# Altium PCB S7CAS-PLEIADES-CARTE-MERE_P01.PcbDoc (part 4 of 9)
Units mil, origin at the board's own origin, x right, y up, seen from the top; angles counter-clockwise.
Board outline 6153 x 3696 mil, 16 copper layers (Top, Ground Plane 1, Signal Layer 1, Ground Plane 2, Signal Layer 2, Ground Plane 3, Power Plane, Ground Plane 4, Ground Plane 5, Power Plane 2, Ground Plane 6, Signal Layer 3, Ground Plane 7, Signal Layer 4, Ground Plane 8, Bottom), stack 75.282 mil thick; 430 components, 328 nets, 2174 pads, 2158 vias.
Unrouted connection lines stored in the file: 202.
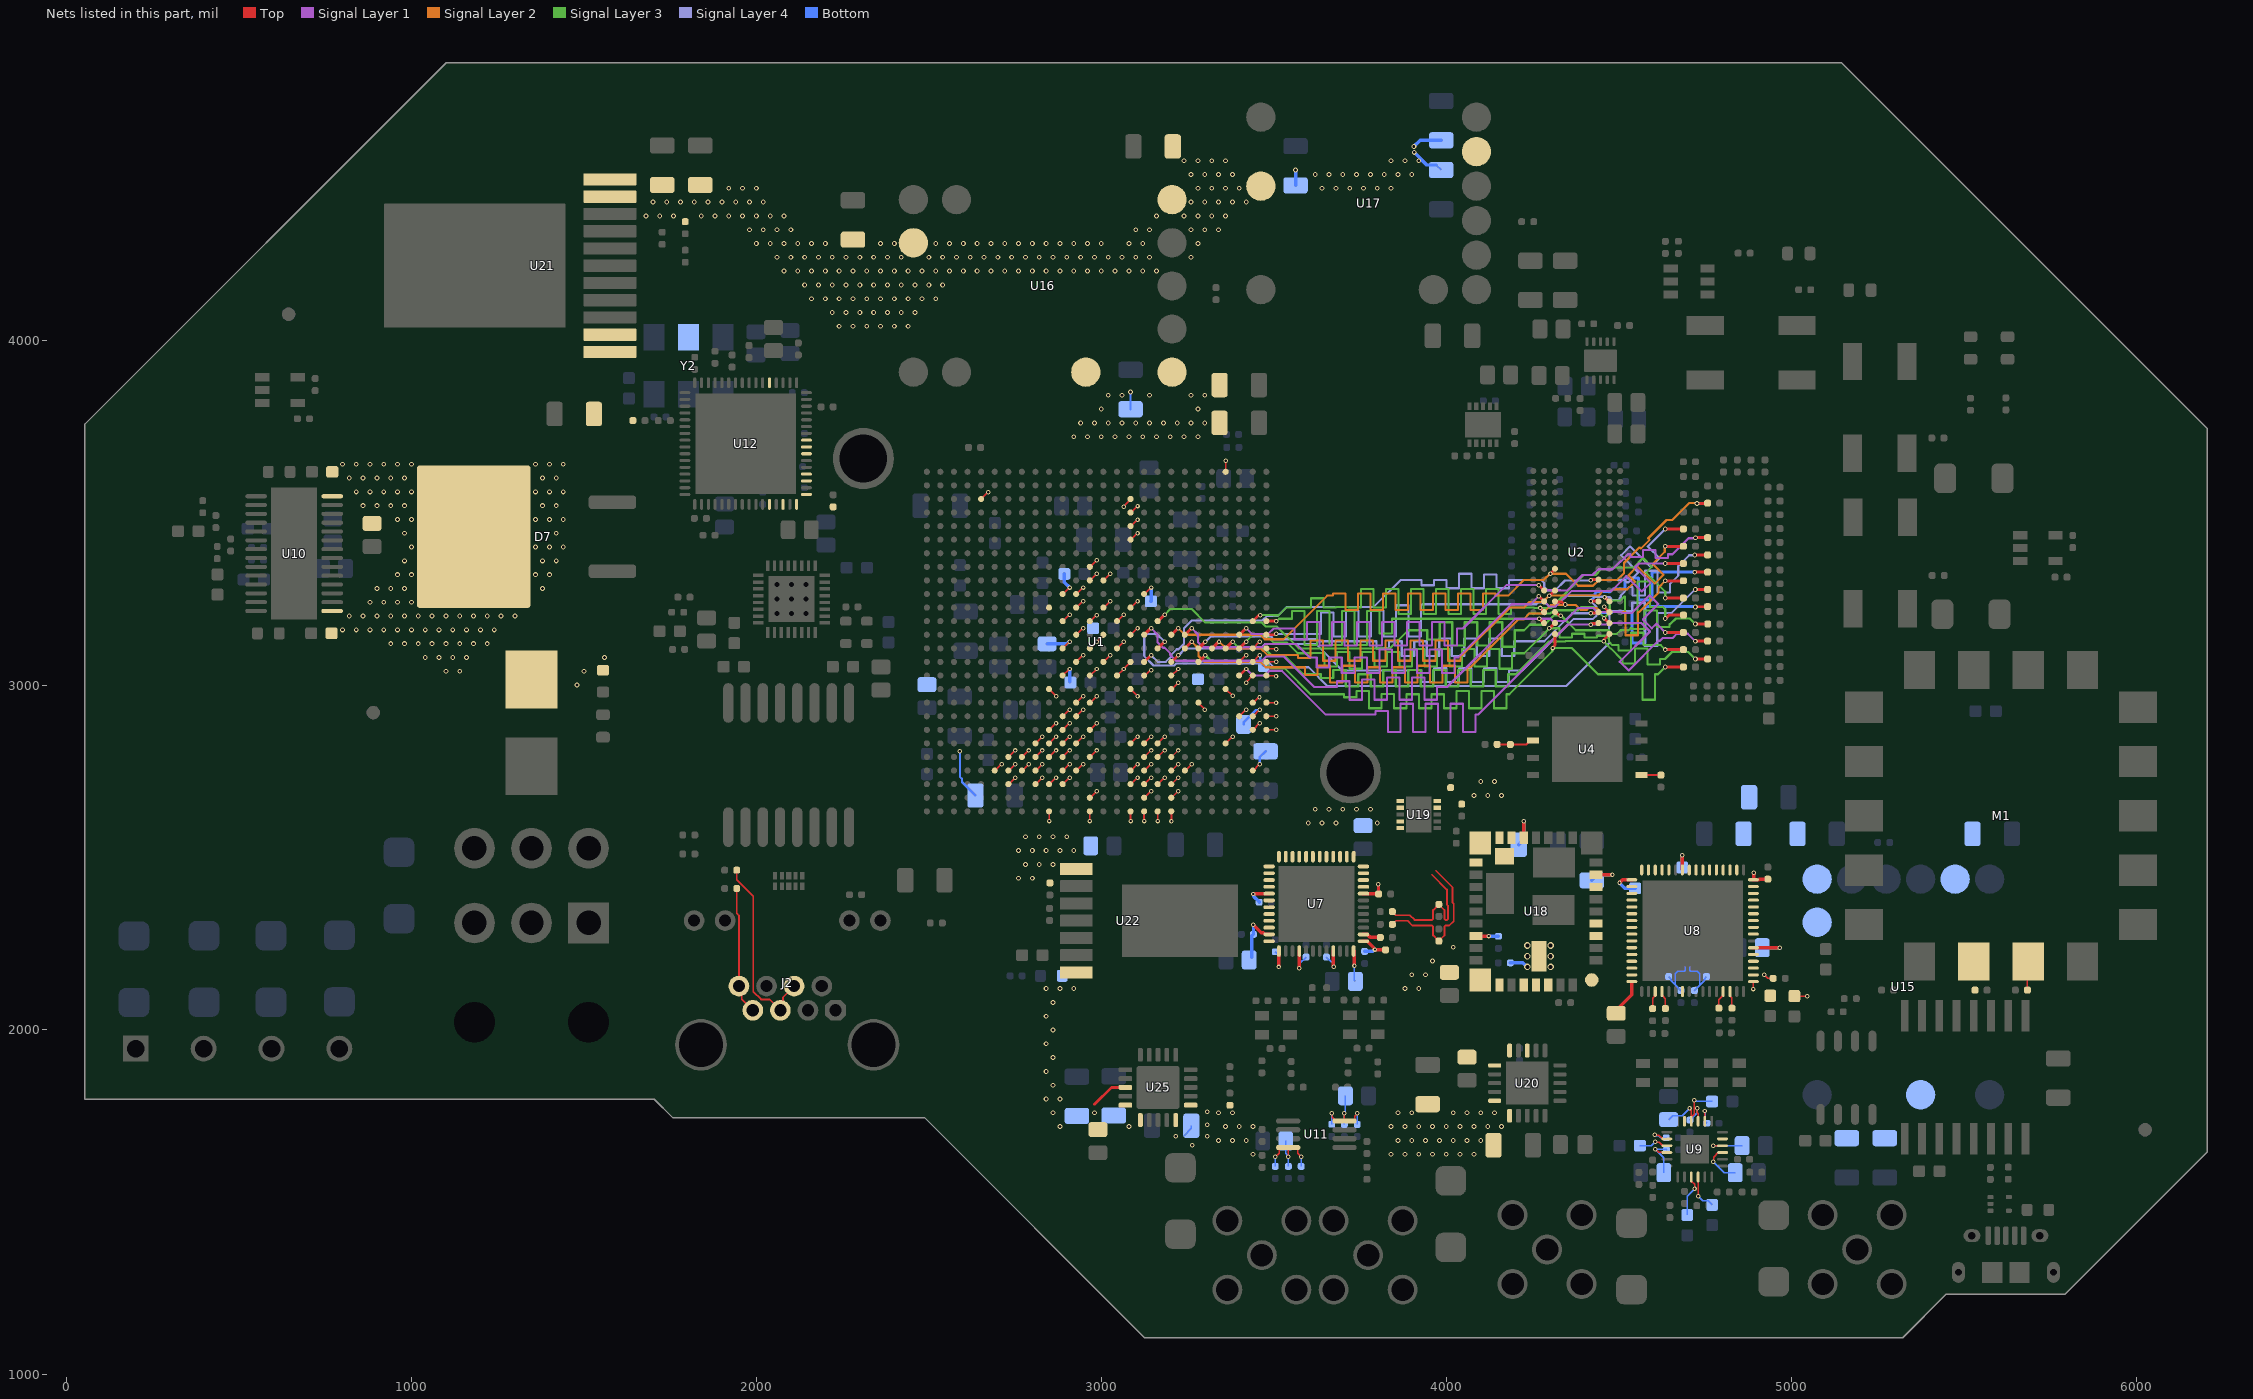
[diagram p17: the nets of this part, all layers, seen from the top]

## Part data (continued)
U23 U24: library part SENS_TEMP_TC74A0-3.3VCTTR, "SENS - TEMPERATURE SENSOR I2C/SMBUS - SOT23-5", Package=SOT23-5, Supplier Part Number 1=TC74A0-3.3VCTDKR-ND, Temperature="-40°C ~ 125°C", Voltage="2.7 V ~ 5.5 V", CreatedBy="Jonathan Bouchard", HelpURL=http://ww1.microchip.com/downloads/en/DeviceDoc/21462D.pdf, Mfg=Microchip, Mfg Part Number=TC74A0-3.3VCTTR, Precision="±2°C (±3°C)", Supplier 1=Digikey
U25: library part REG_LDO_TPS7A4701RGWR, "REG - LINEAR POS ADJ 1A - 20VQFN", Current Rating=1A, Manufacturer #1="Texas Instruments", Manufacturer #2=TBD, Package="20-VQFN Exposed Pad", Supplier Part Number 1=296-37224-1-ND, Temperature="-40°C ~ 125°C", Tolerance=-, Voltage Rating="35V max", Assembly Type=SMD, CreatedBy/Date="L-P Gauthier / 2018-05-29", Cryo=UNKNOWN, GRAMS Lib Spec=2.8, HelpURL=http://www.ti.com/lit/ds/symlink/tps7a47.pdf, Magnetic Material=Unknown, Part Number #1=TPS7A4701RGWR, Part Number #2=TBD, Polarized=Yes, Supplier 1=Digi-Key, VerifiedBy="Caroline Paulin - 28 sept 2018"
U26: "XXX - Description - Package", GRAMS Lib Spec=2.7
Y1: library part OSC_ASDMB-25.000MHZ-LC-T, "OSC - 25MHz XO (Standard) LVCMOS - 4-SMD, No Lead", Manufacturer #1="Abracon LLC", Package="4-SMD, No Lead", Supplier Part Number 1=535-11730-1-ND, Temperature="-40°C ~ +85°C", Tolerance=±50ppm, Voltage Rating="1.8V ~ 3.3V", CreatedBy/Date="Joël Lemay 2019-03-29", Cryo=UNKNOWN, GRAMS Lib Spec=2.8, HelpURL=https://abracon.com/Oscillators/ASDMB.pdf, Magnetic Material=Unknown, Mfg Part Number=ASDMB-25.000MHZ-LC-T, Part Number #1=ASDMB-25.000MHZ-LC-T, Polarized=Yes, Supplier 1=Digi-Key, VerifiedBy="C. Paulin - 29 mai 2019"
Y2: library part OSC_590BD-BDG, "TIM - OSC PROG 125MHz ~ 214.999MHz LVDS 3.3V 7PPM EN/DS - 6-SMD", Current Rating="100 mA (supply)", Manufacturer #1="Silicon Labs", Package=6-SMD, Supplier Part Number 1=590BD-BDG-ND, Temperature="-40°C ~ 85°C", Voltage Rating="3.3V (supply)", CreatedBy/Date="from 590BD-CDG", Cryo=UNKNOWN, GRAMS Lib Spec=2.8, HelpURL=https://www.silabs.com/documents/public/data-sheets/Si590-591.pdf, Magnetic Material=UNKNOWN, Mfg Part Number=590BD-BDG, Part Number #1=590BD-BDG, Polarized=Yes, Supplier 1=Digi-Key, VerifiedBy="Caroline Paulin / 3/10/2019"

## Via types
v1: diameter 14, hole 8, Top to Bottom, 1322 vias
v2: diameter 13, hole 7, Top to Bottom, 662 vias
v3: diameter 19.68, hole 7.87, Top to Bottom, 137 vias
v4: diameter 19.68, hole 11.81, Top to Bottom, 15 vias
v5: diameter 15.75, hole 7.87, Top to Bottom, 12 vias
v6: diameter 22, hole 12, Top to Bottom, 9 vias
v7: diameter 20, hole 12, Top to Bottom, 1 vias

## Nets (pads, with @x,y where several pads share a name; then routed paths per layer and width w, separated by ;. In a path a pad name is that pad's centre, name@x,y a point inside that pad or via, vN(x,y) a via of type N, cw(c..) or ccw(c..) an arc to the next point about the centre after c; other vN are vias at no path point)
1V2: C14.2 C38.2 C40.2 C134.2 C135.2 C136.2 C137.2 C138.2 C139.2 C140.2 U1.K11 U1.K17 U1.L10 U1.L12 U1.L14 U1.L16 U1.M11 U1.M13 U1.M15 U1.N12 U1.N14 U1.N16 U1.P11 U1.P13 U1.P15 U1.R12 U1.R14 U1.R16 U1.T11 U1.T13 U1.T15 U1.T17 U1.U10 U1.U16 U16.5 U16.6 | length 1009.8
  Top w4: U1.K17@2849.15,2988.3 2849.15,2987.84 2869.25,2967.75 v2(2869.52,2967.75) ; U1.L16@2888.52,3027.67 v2@2907.34,3046.49 ; U1.N16@2888.52,3106.41 v2@2907.34,3125.23 ; U1.R16@2888.52,3185.15 v2@2907.34,3203.97 ; U1.U16@2888.52,3263.89 v2@2907.34,3282.71 ; U1.M15@2927.89,3067.04 v2@2946.71,3085.86 ; U1.P15@2927.89,3145.78 v2@2946.71,3164.6 ; U1.T15@2927.89,3224.52 v2@2946.71,3243.34 ; U1.R14@2966.88,3183.55 v2@2985.69,3202.37 ; U1.L14@2967.26,3027.67 v2@2986.08,3046.49 ; U1.N14@2967.26,3106.41 v2@2986.08,3125.23 ; v2(2986.81,3125.23) 2986.81,3125.96 3005.91,3145.05 U1.P13@3005.91,3145.78 ; U1.M13@3006.63,3067.04 v2@3025.45,3085.86 ; U1.T13@3006.63,3224.52 v2@3025.45,3243.34 ; U1.L12@3046,3027.67 v2@3064.82,3046.49 ; U1.N12@3046,3106.41 v2@3064.82,3125.23 ; U1.R12@3046,3185.15 v2@3064.82,3203.97 ; v2@3065.19,3046.85 U1.M11@3085.37,3067.04 ; U1.K11@3085.37,2988.3 3085.37,2987.43 3104.92,2967.89 v2(3104.92,2967.75) ; U1.P11@3085.37,3145.78 v2@3104.19,3164.6 ; U1.T11@3085.37,3224.52 v2@3104.19,3243.34 ; U1.L10@3124.74,3027.67 3127.24,3027.67 3141.86,3042.28 v2(3144.29,3042.28) ; U1.U10@3124.74,3263.89 v2@3143.56,3282.71
  Bottom w4: C139.2@2908.07,3009.06 C139.2@2910.02,3007.12
  Bottom w6: v2(2590.13,2807.78) 2590.13,2734.32 2596.13,2728.32 2596.13,2718.78 C134.2@2635.13,2679.78
  Bottom w7: C40.2@3084.65,3799.72 v1(3084.65,3849.22)
  Bottom w10: C136.2@2842.68,3119.36 2899.77,3119.36 2905.64,3125.23 v2(2908.07,3125.23) ; C138.2@2892.63,3322.08 2892.63,3298.15 v2(2908.07,3282.71) ; C139.2@2908.07,3009.06 v2(2908.07,3046.49) ; C137.2@3143.63,3242.54 3144.29,3243.21 v2(3144.29,3282.71)
  other v1: 2920,3720 2960,3720 3000,3720 3040,3720 3080,3720 3120,3720 3160,3720 3200,3720 3240,3720 3280,3720 2940,3760 2980,3760 3020,3760 3060,3760 3100,3760 3140,3760 3180,3760 3220,3760 3260,3760 3300,3760 3000,3800 3280,3800 3020,3840 3060,3840 3140,3840 3260,3840 3300,3840
  other v2: 2986.81,3046.49 3065.55,3046.49 2947.44,3085.86 3026.18,3085.86 3065.55,3125.23 2947.44,3164.6 3104.92,3164.6 2986.42,3202.37 2908.07,3203.97 3065.55,3203.97 2947.44,3243.34 3026.18,3243.34 3104.92,3243.34
5V: C41.2 C87.2 C88.2 C90.2 C91.2 C92.2 C96.2 C97.2 C98.2 C109.2 C110.2 R124.2 U15.2 U15.9 U16.2 U16.10 U17.2 U17.9 U19.1 U19.2 U19.4 U19.5 U21.10 U21.11 | length 231
  Bottom w4: C96.2@3970.92,4507.5 C96.2@3985.2,4493.22
  Bottom w10: C98.2@3562.98,4448.22 v1(3562.98,4493.22) ; v1(3905.98,4561.22) 3923.98,4579.22 C97.2@3985.2,4579.22 ; v1(3906.98,4544.22) 3943.7,4507.5 C96.2@3970.92,4507.5
  other v1: 3600,2600 3640,2600 3680,2600 3800,2600 3620,2640 3660,2640 3700,2640 3740,2640 3780,2640 2240,4040 2280,4040 2320,4040 2360,4040 2400,4040 2440,4040 2220,4080 2260,4080 2300,4080 2340,4080 2380,4080 2420,4080 2460,4080 2160,4120 2200,4120 2240,4120 2280,4120 2320,4120 2360,4120 2400,4120 2440,4120 2480,4120 2520,4120 2140,4160 2180,4160 2220,4160 2260,4160 2300,4160 2340,4160 2380,4160 2420,4160 2460,4160 2500,4160 2540,4160 2080,4200 2120,4200 2160,4200 2200,4200 2240,4200 2280,4200 2320,4200 2360,4200 2400,4200 2440,4200 2480,4200 2520,4200 2560,4200 2600,4200 2640,4200 2680,4200 2720,4200 2760,4200 2800,4200 2840,4200 2880,4200 2920,4200 2960,4200 3000,4200 3040,4200 3080,4200 3120,4200 3160,4200 2060,4240 2100,4240 2140,4240 2180,4240 2220,4240 2260,4240 2300,4240 2340,4240 2380,4240 2420,4240 2500,4240 2540,4240 2580,4240 2620,4240 2660,4240 2700,4240 2740,4240 2780,4240 2820,4240 2860,4240 2900,4240 2940,4240 2980,4240 3020,4240 3060,4240 3100,4240 3140,4240 3260,4240 2000,4280 2040,4280 2080,4280 2120,4280 2160,4280 2200,4280 2360,4280 2400,4280 2520,4280 2560,4280 2600,4280 2640,4280 2680,4280 2720,4280 2760,4280 2800,4280 2840,4280 2880,4280 2920,4280 2960,4280 3000,4280 3080,4280 3120,4280 3280,4280 1980,4320 2020,4320 2060,4320 2100,4320 3100,4320 3140,4320 3260,4320 3300,4320 3340,4320 1680,4360 1720,4360 1760,4360 1840,4360 1880,4360 1920,4360 1960,4360 2000,4360 2040,4360 2080,4360 3160,4360 3240,4360 3280,4360 3320,4360 3360,4360 1700,4400 1740,4400 1780,4400 1820,4400 1860,4400 1900,4400 1940,4400 1980,4400 2020,4400 3260,4400 3300,4400 3340,4400 3380,4400 3420,4400 1920,4440 1960,4440 2000,4440 3280,4440 3320,4440 3360,4440 3400,4440 3640,4440 3680,4440 3720,4440 3760,4440 3800,4440 3840,4440 3260,4480 3300,4480 3340,4480 3380,4480 3620,4480 3660,4480 3700,4480 3740,4480 3780,4480 3820,4480 3860,4480 3900,4480 3240,4520 3280,4520 3320,4520 3360,4520 3840,4520 3880,4520 3920,4520
5V_AMP: C68.2 C188.2 C189.2 C190.2 C191.2 C213.2 C214.2 C215.2 C216.2 C217.2 C218.2 R133.2 U9.3 U9.4 U9.9 U9.10 U9.14 U9.20 U11.8 U25.1 U25.20 | length 916.3
  Top w4: v2(3504.31,1632.25) 3515.12,1643.06 3515.12,1653.94 3520.55,1659.37 U11.8@3541.59,1659.37 ; v2(3542.31,1632.25) 3542.31,1658.64 U11.8@3541.59,1659.37 ; v2(3579.82,1632.25) 3569.01,1643.06 3569.01,1653.94 3563.59,1659.37 U11.8@3541.59,1659.37 ; v2(4604.13,1695.78) 4604.62,1695.29 4616.63,1695.29 4627.61,1684.31 U9.20@4639.42,1684.31 ; U9.3@4710.28,1574.07 4710.28,1562.26 4719.63,1552.92 v2(4719.63,1539.78) ; v2(4729.97,1518.38) U9.4@4729.97,1574.07 ; U9.14@4749.65,1735.49 v2(4749.65,1765.19) ; v2(4773.96,1618.66) 4775.25,1619.95 4775.25,1631.16 4789.02,1644.94 U9.9@4800.83,1644.94 ; v2(4773.96,1664.78) 4774.04,1664.7 4800.76,1664.7 U9.10@4800.83,1664.62
  Bottom w4: v2(3216.13,1691.78) v2@3217.85,1693.5 ; C68.2@3239.7,1693.5 3260.75,1714.55 C68.2@3260.75,1722.63 ; C188.2@3504.31,1604.75 v2(3504.31,1632.25) ; C191.2@3534.81,1678.25 3534.81,1642.19 3542.31,1634.69 v2(3542.31,1632.25) C189.2@3542.31,1604.75 ; C190.2@3579.31,1604.75 3579.57,1605 3579.57,1632 v2(3579.82,1632.25) ; v2(4604.13,1695.78) 4605.85,1694.06 4615.35,1694.06 4621.63,1687.78 C216.2@4637.63,1687.78 ; C218.2@4698.47,1463.78 4698.47,1518.63 v2(4719.63,1539.78) ; v2(4729.97,1518.38) 4743.59,1504.75 4759.16,1504.75 C215.2@4770.63,1493.28 ; v2(4749.65,1765.19) 4751.38,1763.46 4751.38,1734.03 C213.2@4755.63,1729.78 ; v2(4773.96,1618.66) 4806.1,1586.53 C214.2@4837.65,1586.53 ; v2(4773.96,1664.78) C217.2@4857.63,1664.78
  other v1: 3440,1640 3340,1680 3380,1680 3420,1680 3360,1720 3400,1720 3440,1720 3340,1760 3380,1760
  other v2: 3263.13,1665.78 3307.13,1691.78 3307.13,1725.78 3307.13,1762.78
6V: C36.2 C82.2 C83.2 R127.2 U22.7 U25.13 U25.15 U25.16 | length 112.9
  Top w8: 2980.42,1784.65 3029.25,1833.47 U25.13@3069.89,1833.47 ; U25.13@3069.89,1830.78 U25.13@3073.13,1830.78
  other v1: 2880,1720 3080,1720 2860,1760 2980,1760 2840,1800 2880,1800 2860,1840 2840,1880 2860,1920 2840,1960 2860,2000 2840,2040 2860,2080 2840,2120 2880,2120 2920,2120
+24V: C15.1 C72.2 C76.2 C81.2 C105.2 C108.2 D7.4 F1.2 R55.2 R107.2 R120.2 R135.2 U10.15 U10.28 U18.26 U21.1 U21.2 U22.1 | length 65.7
  Top w5.16: U18.26@4085.91,2272.91 U18.26@4086.45,2272.38
  Top w10: U18.26@4086.45,2272.38 v2(4123.65,2272.38)
  Bottom w5.16: v2(4123.65,2272.38) v2@4123.95,2272.08 ; R120.2@4150.83,2272.08 R120.2@4151.13,2271.78
  Bottom w10: v2@4123.95,2272.08 R120.2@4150.83,2272.08
  other v1: 3880,2120 3880,2120 3920,2120 3920,2120 3900,2160 3900,2160 3940,2160 3940,2160 3960,2200 3960,2200 4020,2240 4020,2240 2760,2440 2760,2440 2800,2440 2800,2440 2780,2480 2780,2480 2820,2480 2820,2480 2860,2480 2860,2480 2760,2520 2760,2520 2800,2520 2800,2520 2840,2520 2840,2520 2880,2520 2880,2520 2920,2520 2920,2520 2780,2560 2780,2560 2820,2560 2820,2560 2860,2560 2860,2560 2900,2560 2900,2560 1480,3000 1480,3000 1100,3040 1100,3040 1140,3040 1140,3040 1500,3040 1500,3040 1040,3080 1040,3080 1080,3080 1080,3080 1120,3080 1120,3080 1160,3080 1160,3080 1560,3080 1560,3080 940,3120 940,3120 980,3120 980,3120 1020,3120 1020,3120 1060,3120 1060,3120 1100,3120 1100,3120 1140,3120 1140,3120 1180,3120 1180,3120 1220,3120 1220,3120 800,3160 800,3160 840,3160 840,3160 880,3160 880,3160 920,3160 920,3160 960,3160 960,3160 1000,3160 1000,3160 1040,3160 1040,3160 1080,3160 1080,3160 1120,3160 1120,3160 1160,3160 1160,3160 1200,3160 1200,3160 1240,3160 1240,3160 820,3200 820,3200 860,3200 860,3200 900,3200 900,3200 940,3200 940,3200 980,3200 980,3200 1020,3200 1020,3200 1060,3200 1060,3200 1100,3200 1100,3200 1140,3200 1140,3200 1180,3200 1180,3200 1220,3200 1220,3200 1260,3200 1260,3200 1300,3200 1300,3200 880,3240 880,3240 920,3240 920,3240 960,3240 960,3240 1000,3240 1000,3240 900,3280 900,3280 940,3280 940,3280 980,3280 980,3280 1380,3280 1380,3280 960,3320 960,3320 1000,3320 1000,3320 1360,3320 1360,3320 1400,3320 1400,3320 980,3360 980,3360 1380,3360 1380,3360 1420,3360 1420,3360 1000,3400 1000,3400 1360,3400 1360,3400 1400,3400 1400,3400 1440,3400 1440,3400 980,3440 980,3440 1420,3440 1420,3440 960,3480 960,3480 1000,3480 1000,3480 1360,3480 1360,3480 1400,3480 1400,3480 1440,3480 1440,3480 860,3520 860,3520 900,3520 900,3520 940,3520 940,3520 980,3520 980,3520 1380,3520 1380,3520 1420,3520 1420,3520 840,3560 840,3560 880,3560 880,3560 920,3560 920,3560 960,3560 960,3560 1000,3560 1000,3560 1360,3560 1360,3560 1400,3560 1400,3560 1440,3560 1440,3560 820,3600 820,3600 860,3600 860,3600 900,3600 900,3600 940,3600 940,3600 980,3600 980,3600 1380,3600 1380,3600 1420,3600 1420,3600 800,3640 800,3640 840,3640 840,3640 880,3640 880,3640 920,3640 920,3640 960,3640 960,3640 1000,3640 1000,3640 1360,3640 1360,3640 1400,3640 1400,3640 1440,3640 1440,3640
-5V_AMP: C112.2 C192.2 C193.2 C194.2 C195.2 C207.2 C208.2 C209.2 C210.2 C211.2 C212.2 R125.2 U9.15 U9.16 U9.21 U9.22 U11.4 U20.1 U20.20 | length 824
  Top w4: v2(3667.93,1758.25) 3669.65,1756.53 3669.65,1747.08 3680.6,1736.14 U11.4@3704.98,1736.14 ; v2(3704.51,1758.25) 3704.51,1736.6 U11.4@3704.98,1736.14 ; v2(3741.31,1758.25) 3741.31,1755.82 3734.78,1749.28 3734.78,1741.56 3729.36,1736.14 U11.4@3704.98,1736.14 ; v2(4605.86,1654.78) 4615.7,1644.94 U9.22@4639.42,1644.94 ; v2(4605.86,1676.43) 4607.58,1674.71 4617.52,1674.71 4627.61,1664.62 U9.21@4639.42,1664.62 ; v2(4705.13,1772.78) 4705.13,1770.34 4710.28,1765.19 U9.16@4710.28,1735.49 4710.28,1747.3 4719.13,1756.14 v2(4719.13,1796.78) ; v2(4728.1,1772.78) 4728.1,1759.42 4729.97,1757.55 U9.15@4729.97,1735.49
  Bottom w4: C192.2@3667.93,1726.64 v2(3667.93,1758.25) ; C193.2@3704.51,1726.3 v2(3704.51,1758.25) 3704.51,1760.69 3707.81,1763.99 C195.2@3707.81,1809.25 ; v2(3741.31,1758.25) 3741.61,1757.95 3741.61,1726.59 C194.2@3741.91,1726.3 ; C209.2@4561.13,1664.78 4594.2,1664.78 v2(4605.86,1676.43) ; C208.2@4630.63,1586.53 4630.63,1630.01 v2(4605.86,1654.78) 4606.86,1653.78 4637.63,1653.78 C207.2@4638.63,1652.78 ; C211.2@4644.63,1740.28 4656.17,1751.82 4684.17,1751.82 v2(4705.13,1772.78) ; C210.2@4706.27,1738.78 4727.77,1760.28 4727.77,1772.46 v2(4728.1,1772.78) ; v2(4719.13,1796.78) 4721.56,1796.78 4725.56,1792.78 C212.2@4770.63,1792.78
  other v1: 3840,1640 3880,1640 3920,1640 3960,1640 4000,1640 4040,1640 4080,1640 3860,1680 3900,1680 3940,1680 3980,1680 4020,1680 4060,1680 4100,1680 3840,1720 3880,1720 3920,1720 3960,1720 4000,1720 4040,1720 4080,1720 4120,1720 4160,1720 3860,1760 3900,1760 4020,1760 4060,1760 4100,1760 4140,1760
-8V: C61.2 C103.2 C104.2 R121.1 U18.1 U18.4 U18.5 U18.8 U18.9 U18.16 U18.17 U18.18 U18.19 U18.20 U18.29 U18.30 U18.32 U18.33 U18.34 U18.37 U18.40 U20.13 U20.15 U20.16 | length 289.4
  Top w10: U18.16@4224.69,2557.36 v2(4224.69,2604.78) ; U18.9@4434.34,2450.08 v2(4481.76,2450.08)
  Bottom w10: R121.1@4185.63,2194.78 4221.69,2194.78 4233.32,2183.15 v4(4234.93,2183.15) ; C104.2@4210.13,2536.78 4224.12,2550.77 4224.12,2604.21 v2(4224.69,2604.78) ; C103.2@4422.13,2433.78 4437.85,2449.5 4481.18,2449.5 v2(4481.76,2450.08)
  other v4: 4302.65,2183.15 4234.93,2213.86 4302.65,2213.86 4234.93,2244.57 4302.65,2244.57
ANA_3V3: C102.2 C165.2 C166.2 C168.2 C169.2 C196.2 C197.2 C198.2 C199.2 R117.2 U7.37 U7.40 U7.45 U7.48 U8.16 U8.33 U8.34 U19.9 U19.10 | length 556.7
  Top w4: U7.40@3573.91,2228.51 U7.40@3574.14,2228.74 ; U7.45@3672.57,2228.74 U7.45@3672.83,2228.48 ; v2@3672.83,2183.64 v2(3673.31,2183.15) ; U7.48@3731.62,2228.74 U7.48@3732.63,2227.74 ; v2@3732.63,2186.93 v2(3733.86,2185.69) ; v2(4890.13,2118.78) 4890.13,2139.96 U8.33@4890.31,2140.14 ; v2(4921.64,2159.83) 4931.69,2149.78 C165.2@4947.63,2149.78 ; C168.2@5009.13,2098.28 5009.63,2097.78 v2(5046.13,2097.78)
  Top w10: v2@3514.84,2182.76 U7.37@3514.84,2228.95 ; v2(3573.91,2179.51) U7.40@3573.91,2228.51 ; v2@3672.83,2183.64 U7.45@3672.83,2228.48 ; v2@3732.63,2186.93 U7.48@3732.63,2227.74 ; C166.2@4492.63,2050.78 4492.63,2056.78 4537.94,2102.1 U8.16@4537.94,2140.14
  Bottom w4: C198.2@3504.31,2226.75 3515.31,2215.75 3515.31,2183.24 v2(3514.82,2182.75) ; v2(3573.91,2179.51) 3574.14,2179.74 3574.14,2192.01 C197.2@3593.6,2211.47 ; C196.2@3652.65,2211.47 3666.15,2197.97 3670.97,2197.97 3673.31,2195.63 v2(3673.31,2183.15) ; v2(3733.86,2185.69) 3733.86,2143.54 C199.2@3736.43,2140.97
  other v1: 4080,2680 4120,2680 4160,2680 4100,2720 4140,2720
CAN_CLK_N: C100.2 R60.1 U12.20 | length 131.9
  Bottom w4: 4706.27,2183.78 4706.27,2173.12 4708.62,2170.78 4728.1,2170.78 4735.13,2163.75 4735.13,2130.28 ; C100.2@4719.13,2114.28 4735.13,2130.28 ; R60.1@4754.13,2154.78 4748.6,2149.25 4748.6,2143.75 4735.13,2130.28
CAN_CLK_P: C99.2 R59.2 U12.19 | length 131.4
  Bottom w4: R59.2@4644.63,2154.78 4650.16,2149.25 4650.16,2144.25 4663.63,2130.78 ; C99.2@4680.13,2114.28 4663.63,2130.78 ; 4692.27,2183.78 4692.27,2173.12 4689.93,2170.78 4670.66,2170.78 4663.63,2163.75 4663.63,2130.78
CAN_CLKOUT_N: U1.A14 U8.57 | length 27.8
  Top w4: v2@2966.54,2606.13 U1.A14@2966.54,2633.97
  other v2: 2966.83,2605.84
CAN_CLKOUT_P: U1.B14 U8.56 | length 26.6
  Top w4: U1.B14@2967.26,2673.34 v2@2986.08,2692.16
  other v2: 2986.81,2692.16
CAN_CM: U8.23 U9.11 U9.17
CAN_CTRL1: U1.M3 U8.35 | length 26.6
  Top w4: U1.M3@3400.33,3067.04 v2@3419.15,3085.86
  other v2: 3419.88,3085.86
CAN_CTRL2: U1.M1 U8.36 | length 28.1
  Top w4: U1.M1@3478.35,3067.04 v2(3506.5,3067.04)
CAN_CTRL3: U1.L2 U8.37 | length 28.8
  Top w4: v2(3419.76,3007.12) 3419.76,3007.79 3439.65,3027.67 U1.L2@3439.7,3027.67
CAN_DA0_N: U1.G14 U8.40 | length 26.6
  Top w4: U1.G14@2967.26,2870.19 v2@2986.08,2889.01
  other v2: 2986.81,2889.01
CAN_DA0_P: U1.J14 U8.41 | length 26.6
  Top w4: U1.J14@2967.26,2948.93 v2@2986.08,2967.75
  other v2: 2986.81,2967.75
CAN_DA2_N: U1.D15 U8.42 | length 26.6
  Top w4: U1.D15@2927.89,2752.08 v2@2946.71,2770.9
  other v2: 2947.44,2770.9
CAN_DA2_P: U1.E14 U8.43 | length 26.6
  Top w4: U1.E14@2967.26,2791.45 v2@2986.08,2810.27
  other v2: 2986.81,2810.27
CAN_DA4_N: U1.C16 U8.44 | length 26.6
  Top w4: U1.C16@2888.52,2712.71 v2@2907.34,2731.53
  other v2: 2908.07,2731.53
CAN_DA4_P: U1.D16 U8.45 | length 26.6
  Top w4: U1.D16@2888.52,2752.08 v2@2907.34,2770.9
  other v2: 2908.07,2770.9
CAN_DA6_N: U1.F15 U8.46 | length 26.6
  Top w4: U1.F15@2927.89,2830.82 v2@2946.71,2849.64
  other v2: 2947.44,2849.64
CAN_DA6_P: U1.G16 U8.47 | length 26.6
  Top w4: U1.G16@2888.52,2870.19 v2@2907.34,2889.01
  other v2: 2908.07,2889.01
CAN_DA8_N: U1.E17 U8.50 | length 26.6
  Top w4: U1.E17@2849.15,2791.45 v2@2867.97,2810.27
  other v2: 2868.7,2810.27
CAN_DA8_P: U1.F17 U8.51 | length 26.6
  Top w4: U1.F17@2849.15,2830.82 v2@2867.97,2849.64
  other v2: 2868.7,2849.64
CAN_DA10_N: U1.E16 U8.52 | length 26.6
  Top w4: U1.E16@2888.52,2791.45 v2@2907.34,2810.27
  other v2: 2908.07,2810.27
CAN_DA10_P: U1.F16 U8.53 | length 26.6
  Top w4: U1.F16@2888.52,2830.82 v2@2907.34,2849.64
  other v2: 2908.07,2849.64
CAN_DA12_N: U1.A17 U8.54 | length 27.8
  Top w4: v2@2848.43,2606.13 U1.A17@2848.43,2633.97
  other v2: 2848.72,2605.84
CAN_DA12_P: U1.C17 U8.55 | length 26.6
  Top w4: U1.C17@2849.15,2712.71 v2@2867.97,2731.53
  other v2: 2868.7,2731.53
CAN_DB0_N: U1.H15 U8.60 | length 26.6
  Top w4: U1.H15@2927.89,2909.56 v2@2946.71,2928.38
  other v2: 2947.44,2928.38
CAN_DB0_P: U1.J15 U8.61 | length 26.6
  Top w4: U1.J15@2927.89,2948.93 v2@2946.71,2967.75
  other v2: 2947.44,2967.75
CAN_DB2_N: U1.C18 U8.62 | length 26.6
  Top w4: U1.C18@2809.78,2712.71 v2@2828.6,2731.53
  other v2: 2829.33,2731.53
CAN_DB2_P: U1.D18 U8.63 | length 26.6
  Top w4: U1.D18@2809.78,2752.08 v2@2828.6,2770.9
  other v2: 2829.33,2770.9
CAN_DB4_N: U1.D19 U8.2 | length 26.6
  Top w4: U1.D19@2770.41,2752.08 v2@2789.23,2770.9
  other v2: 2789.96,2770.9
CAN_DB4_P: U1.E19 U8.3 | length 26.6
  Top w4: U1.E19@2770.41,2791.45 v2@2789.23,2810.27
  other v2: 2789.96,2810.27
CAN_DB6_N: U1.G17 U8.4 | length 26.6
  Top w4: U1.G17@2849.15,2870.19 v2@2867.97,2889.01
  other v2: 2868.7,2889.01
CAN_DB6_P: U1.H16 U8.5 | length 26.6
  Top w4: U1.H16@2888.52,2909.56 v2@2907.34,2928.38
  other v2: 2908.07,2928.38
CAN_DB8_N: U1.C20 U8.6 | length 26.6
  Top w4: U1.C20@2731.04,2712.71 v2@2749.86,2731.53
  other v2: 2750.59,2731.53
CAN_DB8_P: U1.D21 U8.7 | length 26.6
  Top w4: U1.D21@2691.67,2752.08 v2@2710.49,2770.9
  other v2: 2711.22,2770.9
CAN_DB10_N: U1.E18 U8.8 | length 26.6
  Top w4: U1.E18@2809.78,2791.45 v2@2828.6,2810.27
  other v2: 2829.33,2810.27
CAN_DB10_P: U1.F18 U8.9 | length 26.6
  Top w4: U1.F18@2809.78,2830.82 v2@2828.6,2849.64
  other v2: 2829.33,2849.64
CAN_DB12_N: U1.D20 U8.10 | length 26.6
  Top w4: U1.D20@2731.04,2752.08 v2@2749.86,2770.9
  other v2: 2750.59,2770.9
CAN_DB12_P: U1.E20 U8.11 | length 26.6
  Top w4: U1.E20@2731.04,2791.45 v2@2749.86,2810.27
  other v2: 2750.59,2810.27
CAN_IN1_N: R88.1 U8.30 | length 50.7
  Top w4: U8.30@4822.39,2111.6 4822.39,2099.01 4828.13,2093.28 R88.1@4828.13,2063.28
CAN_IN1_P: R87.1 U8.29 | length 53.5
  Top w4: R87.1@4790.13,2063.28 4790.13,2087.8 4802.71,2100.38 U8.29@4802.71,2111.6
CAN_IN2_N: R74.1 U8.20 | length 53.3
  Top w4: U8.20@4625.54,2111.6 4625.54,2100.38 4635.13,2090.8 R74.1@4635.13,2062.28
CAN_IN2_P: R70.1 U8.19 | length 53
  Top w4: R70.1@4598.13,2061.78 4598.13,2092.65 4605.86,2100.38 U8.19@4605.86,2111.6
CAN_RESET: U1.K8 U8.12 | length 26.6
  Top w4: U1.K8@3203.48,2988.3 v2@3222.3,3007.12
  other v2: 3223.03,3007.12
CAN_SCLK: U1.L8 U8.13 | length 26.6
  Top w4: U1.L8@3203.48,3027.67 v2@3222.3,3046.49
  other v2: 3223.03,3046.49
CAN_SDATA: U1.N1 U8.14 | length 29.2
  Top w4: U1.N1@3478.35,3106.41 3479.66,3105.1 3505.18,3105.1 v2(3506.5,3103.78)
CAN_SDOUT: U1.L1 U8.64 | length 29
  Top w4: U1.L1@3478.24,3027.95 3479.42,3026.77 3505.49,3026.77 v2(3506.39,3025.88)
CAN_SEN: U1.N2 U8.15 | length 26.6
  Top w4: U1.N2@3439.7,3106.41 v2@3458.52,3125.23
  other v2: 3459.25,3125.23
CCLK: R34.1 R35.2 U1.AD22 U4.6 | length 135.4
  Top w4: U1.AD22@2652.3,3539.48 v2@2671.12,3558.3
  Top w6: R35.2@4147.5,2828 4147.62,2827.88 4185.51,2827.88 R34.1@4185.63,2827.77 4231.45,2827.77 4242.69,2839.01 U4.6@4251.55,2839.01
  other v2: 2671.85,3558.3
CLK_1V8: C7.2 C8.2 C9.2 C55.2 C56.2 C59.2 C118.2 C130.2 C131.2 C132.2 C133.2 C200.2 C201.2 C202.2 C203.2 C204.2 C205.2 C206.2 U1.D2 U1.F4 U1.H2 U1.J6 U1.K4 U1.M2 U7.1 U7.2 U7.8 U7.29 U7.35 U8.1 U8.38 U8.48 U8.58 U15.4 U15.5 | length 1126.3
  Top w4: U1.J6@3282.22,2948.93 3282.22,2947.2 3300.05,2929.38 v2(3300.05,2928.38) ; U1.F4@3360.96,2830.82 v2@3379.78,2849.64 ; U1.K4@3360.96,2988.26 3380.44,2968.78 v2(3381.13,2968.78) ; U1.D2@3439.7,2752.08 v2@3458.52,2770.9 ; U1.H2@3439.7,2909.56 v2@3458.52,2928.38 ; U1.M2@3439.7,3067.04 v2@3458.52,3085.86
  Top w10: v2(3440.81,2305.2) 3463.64,2282.37 3469.64,2282.37 3474.79,2277.22 U7.35@3486.31,2277.2 ; v2(3440.81,2394.25) 3441.63,2394.25 3442.68,2395.31 U7.29@3486.31,2395.31 ; U7.1@3759.94,2257.51 3771.16,2257.51 3792.74,2235.93 3792.74,2233.83 v2(3793.31,2233.25) 3794.13,2233.25 3795.13,2232.25 C201.2@3823.81,2232.25 ; U7.2@3759.94,2277.2 3771.43,2277.2 3780.38,2268.25 C200.2@3808.81,2268.25 ; U7.8@3759.94,2395.31 3760.13,2395.11 3802.96,2395.11 C55.2@3803.81,2394.25 3803.56,2394.5 3803.56,2422 v2(3803.31,2422.25) ; v2(4502.13,2426.78) 4510.76,2435.42 U8.1@4537.94,2435.42 ; v2(4684.13,2506.78) 4684.36,2506.54 4684.36,2464.2 U8.58@4684.6,2463.96 ; U8.38@4890.31,2238.57 v2(4966.39,2238.57) ; v2(4891.13,2455.78) 4890.72,2455.37 4890.72,2435.83 U8.48@4890.31,2435.42 4890.78,2435.89 4905.74,2435.89 4907.13,2437.28 C203.2@4932.13,2437.28
  Bottom w7: C131.2@3412.63,2885.78 3412.63,2891.78 3448.08,2927.23 3458.1,2927.23 v2(3459.25,2928.38) ; v2(3459.25,2770.9) 3459.25,2790.91 C130.2@3476.13,2807.78 ; v2(3459.25,3085.86) 3460.4,3084.71 3460.4,3066 C132.2@3471.02,3055.38
  Bottom w10: C118.2@3436.43,2211.09 C59.2@3436.43,2272.81 ; v2(3440.81,2394.25) 3441.39,2393.68 3441.39,2387.12 3457.25,2371.26 C56.2@3457.25,2370.28 ; C59.2@3441.06,2277.45 v2@3441.06,2304.95 ; C202.2@3763.31,2227.75 3787,2227.75 3792.5,2233.25 v2(3793.31,2233.25) ; v2(4502.13,2426.78) 4502.7,2426.21 4502.7,2425.34 4517.26,2410.78 C206.2@4547.63,2410.78 ; C205.2@4684.13,2470.78 v2(4684.13,2506.78) ; C204.2@4916.13,2238.57 v2(4966.39,2238.57)
  other v2: 3380.51,2849.64
CLK_OSI_125M_OE: U1.U15 Y2.2 | length 26.6
  Top w4: U1.U15@2927.89,3263.89 v2@2946.71,3282.71
  other v2: 2947.44,3282.71
CLK_PLL_LOCK: U1.AD11 U12.37 | length 30.8
  Top w4: v2(3064.82,3517.21) 3064.82,3518.43 3085.37,3538.98 U1.AD11@3085.37,3539.48
CLK_PWRDN: U1.V14 U12.12 | length 26.6
  Top w4: U1.V14@2967.26,3303.26 v2@2986.08,3322.08
  other v2: 2986.81,3322.08
CLK_SPI_CLK: U1.AB11 U12.24 | length 26.6
  Top w5.73: U1.AB11@3085.37,3460.74 v2@3104.19,3479.56
  other v2: 3104.92,3479.56
CLK_SPI_LE: U1.AA11 U12.25 | length 26.6
  Top w5.73: U1.AA11@3085.37,3421.37 v2@3104.19,3440.19
  other v2: 3104.92,3440.19
CLK_SPI_MISO: R54.2 U1.W14 | length 26.6
  Top w5.73: U1.W14@2967.26,3342.63 v2@2986.08,3361.45
  other v2: 2986.81,3361.45
CLK_SPI_MOSI: U1.V13 U12.23 | length 26.6
  Top w5.73: U1.V13@3006.63,3303.26 v2@3025.45,3322.08
  other v2: 3026.18,3322.08
CLK_SYNC: U1.AC11 U12.14 | length 26.6
  Top w4: U1.AC11@3085.37,3500.11 v2@3104.19,3518.93
  other v2: 3104.92,3518.93
CNA_CLK_N: C95.2 R91.1 U12.17 | length 387.4
  Top w5.16: C95.2@3843.58,2343 3843.73,2343 3854.03,2332.71 3894.52,2332.71 3908.14,2319.08 3958.71,2319.08 3961.73,2322.11 3961.73,2347.67 R91.1@3978.31,2364.25 3994.9,2347.67 3994.9,2322.11 3997.92,2319.08 4002.2,2319.08 4005.22,2322.11 4005.22,2359.81 4001.81,2363.22 4001.81,2406.97 3958.71,2450.08
CNA_CLK_P: C94.2 R72.2 U12.16 | length 427.3
  Top w5.16: C94.2@3843.81,2306.25 3843.96,2306.25 3854.26,2316.55 3887.82,2316.55 3901.45,2302.92 3958.71,2302.92 3961.73,2299.9 3961.73,2274.33 R72.2@3978.31,2257.75 3994.9,2274.33 3994.9,2299.9 3997.92,2302.92 4008.89,2302.92 4021.39,2315.41 4021.39,2366.51 4017.98,2369.92 4017.98,2413.67 3970.14,2461.51
CNA_CS: U1.H1 U7.33 | length 28.1
  Top w4: U1.H1@3478.35,2909.56 v2(3506.5,2909.56)
CNA_D0_N: U1.D7 U7.28 | length 26.6
  Top w5.16: U1.D7@3242.85,2752.08 v2@3261.67,2770.9
  other v2: 3262.4,2770.9
CNA_D0_P: U1.E8 U7.27 | length 26.6
  Top w5.16: U1.E8@3203.48,2791.45 v2@3222.3,2810.27
  other v2: 3223.03,2810.27
CNA_D1_N: U1.C8 U7.26 | length 26.6
  Top w5.16: U1.C8@3203.48,2712.71 v2@3222.3,2731.53
  other v2: 3223.03,2731.53
CNA_D1_P: U1.D8 U7.25 | length 26.6
  Top w5.16: U1.D8@3203.48,2752.08 v2@3222.3,2770.9
  other v2: 3223.03,2770.9
CNA_D2_N: U1.E9 U7.24 | length 26.6
  Top w5.16: U1.E9@3164.11,2791.45 v2@3182.93,2810.27
  other v2: 3183.66,2810.27
CNA_D2_P: U1.F9 U7.23 | length 26.6
  Top w5.16: U1.F9@3164.11,2830.82 v2@3182.93,2849.64
  other v2: 3183.66,2849.64
CNA_D3_N: U1.A8 U7.22 | length 28.7
  Top w5.16: U1.A8@3202.76,2633.97 3203.05,2633.67 3203.05,2605.84 v2(3203.35,2605.54)
CNA_D3_P: U1.B8 U7.21 | length 26.6
  Top w5.16: U1.B8@3203.48,2673.34 v2@3222.3,2692.16
  other v2: 3223.03,2692.16
CNA_D4_N: U1.A9 U7.16 | length 27.8
  Top w5.16: v2@3163.39,2606.13 U1.A9@3163.39,2633.97
  other v2: 3163.68,2605.84
CNA_D4_P: U1.C9 U7.15 | length 26.6
  Top w5.16: U1.C9@3164.11,2712.71 v2@3182.93,2731.53
  other v2: 3183.66,2731.53
CNA_D5_N: U1.F10 U7.14 | length 26.6
  Top w5.16: U1.F10@3124.74,2830.82 v2@3143.56,2849.64
  other v2: 3144.29,2849.64
CNA_D5_P: U1.E10 U7.13 | length 26.6
  Top w5.16: U1.E10@3124.74,2791.45 v2@3143.56,2810.27
  other v2: 3144.29,2810.27
CNA_D6_N: U1.C10 U7.12 | length 26.6
  Top w5.16: U1.C10@3124.74,2712.71 v2@3143.56,2731.53
  other v2: 3144.29,2731.53
CNA_D6_P: U1.D10 U7.11 | length 26.6
  Top w5.16: U1.D10@3124.74,2752.08 v2@3143.56,2770.9
  other v2: 3144.29,2770.9
CNA_D7_N: U1.A10 U7.10 | length 27.8
  Top w5.16: v2@3124.02,2606.13 U1.A10@3124.02,2633.97
  other v2: 3124.31,2605.84
CNA_D7_P: U1.B10 U7.9 | length 26.6
  Top w5.16: U1.B10@3124.74,2673.34 v2@3143.56,2692.16
  other v2: 3144.29,2692.16
CNA_DCI_N: U1.F11 U7.18 | length 26.6
  Top w5.16: U1.F11@3085.37,2830.82 v2@3104.19,2849.64
  other v2: 3104.92,2849.64
CNA_DCI_P: U1.D11 U7.17 | length 26.6
  Top w5.16: U1.D11@3085.37,2752.08 v2@3104.19,2770.9
  other v2: 3104.92,2770.9
CNA_FRAME_N: U1.A11 U7.20 | length 27.8
  Top w5.16: v2@3084.65,2606.13 U1.A11@3084.65,2633.97
  other v2: 3084.94,2605.84
CNA_FRAME_P: U1.C11 U7.19 | length 26.6
  Top w5.16: U1.C11@3085.37,2712.71 v2@3104.19,2731.53
  other v2: 3104.92,2731.53
CNA_IRQ: U1.G2 U7.34 | length 26.6
  Top w4: U1.G2@3439.7,2870.19 v2@3458.52,2889.01
  other v2: 3459.25,2889.01
CNA_RESET: U1.J2 U7.36 | length 25.2
  Top w4: U1.J2@3439.7,2948.93 3441.07,2948.93 3456.42,2964.28 v2(3458.51,2964.28)
CNA_SCLK: U1.J1 U7.32 | length 28.1
  Top w4: U1.J1@3478.24,2948.93 v2(3506.39,2948.93)
CNA_SDIO: U1.H3 U7.31 | length 26.6
  Top w4: U1.H3@3400.33,2909.56 v2@3419.15,2928.38
  other v2: 3419.88,2928.38
CNA_TX_ENABLE: U1.G1 U7.30 | length 28.1
  Top w4: U1.G1@3478.35,2870.19 v2(3506.5,2870.19)
CONN_4_5: J2.4 J2.5 R51.2 | length 559.4
  Top w5.16: R51.2@1943.06,2463.26 1943.06,2436.05 1990.99,2388.12 1990.99,2111.2 2013.59,2088.59 2038.15,2088.59 J2.5@2069.57,2057.18 2077.32,2064.92 2077.32,2094.92 J2.4@2109.57,2127.18
CONN_7_8: J2.7 J2.8 R52.2 | length 372.3
  Top w5.16: R52.2@1943.06,2410.26 1943.06,2338.25 1949.57,2331.74 J2.8@1949.57,2127.18 1957.32,2119.43 1957.32,2089.43 J2.7@1989.57,2057.18
CSO_B: R39.1 U1.AF4 U4.1 | length 86.4
  Top w4: U1.AF4@3360.53,3619.38 v2@3360.53,3649.42
  Top w6: U4.1@4565.72,2739.01 R39.1@4622.06,2739.01
  other v2: 3360.83,3649.72
DD_N: M1.16 R43.2
DD_P: M1.17 R45.2 | length 83.7
  Top w4: R45.2@5684.63,2115.78 5684.63,2196.3 M1.17@5686.87,2198.54
DDR3_A0: R1.1 U1.N7 U2.N3 | length 2408.9
  Top w8.64: U1.N7@3242.85,3106.41 v2@3261.67,3125.23 ; U2.N3@4315.2,3242.63 4316.93,3240.89 4335.74,3240.89 4343.53,3233.11 v1(4344.98,3233.11) ; v1(4634.98,3302.29) R1.1@4687.48,3302.29
  Signal Layer 2 w6.24: v2(3262.4,3125.23) 3281.55,3106.08 3281.55,3083.98 3298.5,3067.04 3460.79,3067.04 3476.41,3051.42 3533.59,3051.42 3590.75,3051.42 3590.75,3028.87 3626.99,3028.87 3626.99,3055.88 3663.23,3055.88 3663.23,3007.4 3699.48,3007.4 3699.48,3055.88 3735.72,3055.88 3735.72,3007.4 3771.96,3007.4 3771.96,3051.42 3808.2,3051.42 3808.2,3007.4 3844.44,3007.4 3844.44,3051.42 3880.69,3051.42 3880.69,3007.4 3916.93,3007.4 3916.93,3055.88 3953.17,3055.88 3953.17,3007.4 3989.41,3007.4 3989.41,3055.88 4025.66,3055.88 4025.66,3007.4 4061.9,3007.4 4061.9,3051.42 4065.02,3051.42 4070.06,3051.42 4209.57,3190.92 4224.59,3190.92 4241.47,3207.81 4280.02,3207.81 4298.71,3226.49 4298.71,3228.82 4302.36,3232.48 4344.98,3232.48 4374.37,3232.48 4389.36,3217.49 4406.26,3217.49 4412.51,3223.74 4435.27,3223.74 4447.21,3211.79 4479.08,3211.79 4519.02,3211.79 4519.02,3144.55 4555.27,3144.55 4555.27,3211.79 4558.39,3211.79 4559.54,3211.79 4614.98,3267.22 4614.98,3282.29 v1(4634.98,3302.29)
DDR3_A1: R2.1 U1.N6 U2.P7 | length 2263.6
  Top w8.64: U1.N6@3282.22,3106.41 v2@3301.04,3125.23 ; v2(4418.98,3208.11) 4420.16,3208.11 4421.44,3209.4 4439.44,3209.4 U2.P7@4441.18,3211.13 ; v1(4721.98,3226.59) 4722.33,3226.94 4757.12,3226.94 R2.1@4757.48,3227.29
  Signal Layer 4 w6.24: v2(3301.77,3125.23) 3317.39,3140.85 3491.96,3140.85 3500.03,3132.78 3622.6,3132.78 3628.51,3126.87 3655.04,3126.87 3798.19,3126.87 3798.19,3106.24 3834.43,3106.24 3834.43,3126.87 3870.68,3126.87 3870.68,3084.46 3906.92,3084.46 3906.92,3126.87 3943.16,3126.87 3943.16,3084.46 3979.4,3084.46 3979.4,3135.03 4015.64,3135.03 4015.64,3084.46 4051.89,3084.46 4051.89,3135.03 4088.13,3135.03 4088.13,3084.46 4124.37,3084.46 4124.37,3135.03 4160.61,3135.03 4160.61,3084.46 4196.85,3084.46 4196.85,3126.87 4199.98,3126.87 4284.09,3126.87 4365.33,3208.11 v2(4418.98,3208.11)
  Bottom w8.63: v2(4418.98,3208.11) 4447.72,3208.11 4450.21,3210.61 4479.69,3210.61 4481.66,3212.58 4509.98,3212.58 4537.72,3212.58 4537.72,3122.34 4576.35,3122.34 4576.35,3227.29 4580.66,3227.29 4721.27,3227.29 v1(4721.98,3226.59)
DDR3_A2: R3.1 U1.R9 U2.P3 | length 2331.8
  Top w8.64: U1.R9@3164.11,3185.15 v2@3182.93,3203.97 ; U2.P3@4315.2,3211.13 4317.65,3211.13 4326.59,3202.2 4330.41,3202.2 v2(4331.24,3201.37) ; v1(4721.98,3176.91) 4722.17,3177.1 4757.79,3177.1 R3.1@4757.98,3177.29
  Signal Layer 3 w6.24: v2(3183.66,3203.97) 3200.07,3220.37 3262.16,3220.37 3301.53,3181 3464.94,3181 3476.41,3169.53 3508.57,3169.53 3571.88,3106.22 3596.79,3106.22 3836.9,3106.22 3889.58,3158.9 3944.96,3158.9 3944.96,3131.99 3981.2,3131.99 3981.2,3181.91 4017.44,3181.91 4017.44,3115.08 4053.68,3115.08 4053.68,3181.91 4089.92,3181.91 4089.92,3115.08 4126.17,3115.08 4126.17,3181.91 4162.41,3181.91 4162.41,3111.02 4198.65,3111.02 4198.65,3158.9 4201.77,3158.9 4225.76,3158.9 4241.86,3174.99 4284.88,3174.99 4311.59,3201.7 4330.25,3201.7 v2@4330.58,3202.03 ; v2(4331.24,3201.37) 4332.57,3201.37 4375.04,3158.9 4470.8,3158.9 4481.44,3148.25 4494.38,3148.25 4503.93,3157.8 4505.03,3158.9 4528.4,3158.9 4534.47,3164.97 4538.13,3164.97 4538.13,3162.16 4574.37,3162.16 4574.37,3215.59 4610.61,3215.59 4610.61,3168.37 4646.85,3168.37 4646.85,3177.29 4649.98,3177.29 4665.81,3193.12 4705.76,3193.12 v1(4721.98,3176.91)
DDR3_A3: R4.1 U1.P7 U2.N2 | length 2443.7
  Top w8.64: U1.P7@3242.85,3145.78 v2@3261.67,3164.6 ; v2(4268.3,3257.81) 4268.41,3257.81 4283.59,3242.63 U2.N2@4283.7,3242.63 ; v1(4634.98,3352.29) R4.1@4687.48,3352.29
  Signal Layer 1 w6.24: v2(3262.4,3164.6) 3280.39,3146.61 3280.39,3124.52 3295.3,3109.61 3465.72,3109.61 3475.52,3119.4 3564.21,3119.4 3603.4,3080.22 3617.63,3080.22 3624.69,3080.22 3624.69,3051.19 3660.93,3051.19 3660.93,3080.22 3697.18,3080.22 3697.18,3034.89 3733.42,3034.89 3733.42,3080.22 3769.66,3080.22 3769.66,3034.89 3805.9,3034.89 3805.9,3103.42 3842.15,3103.42 3842.15,3034.89 3878.39,3034.89 3878.39,3103.42 3914.63,3103.42 3914.63,3034.89 3950.87,3034.89 3950.87,3103.42 3987.11,3103.42 3987.11,3034.89 4023.36,3034.89 4023.36,3080.22 4026.48,3080.22 4034.6,3080.22 4188.6,3234.22 4244.71,3234.22 v2(4268.3,3257.81) 4298.02,3228.09 4317.16,3228.09 4339.55,3250.48 4341.07,3250.48 4363.46,3272.87 4479.08,3272.87 4485.18,3278.97 4521.89,3315.68 4566.62,3270.95 4592.24,3296.58 4547.52,3341.3 4549.72,3343.51 4558.5,3352.29 v1(4634.98,3352.29)
DDR3_A4: R5.1 U1.N9 U2.P8 | length 2283.5
  Top w8.64: U1.N9@3164.11,3106.41 v2@3182.93,3125.23 ; v2(4457.68,3227.42) 4458.52,3226.59 4458.52,3224.97 4472.36,3211.13 U2.P8@4472.68,3211.13 ; v1(4721.98,3277.29) R5.1@4757.48,3277.29
  Signal Layer 4 w6.24: v2(3183.66,3125.23) 3160.7,3148.19 3132.98,3148.19 3124.31,3139.53 3124.31,3083.75 3151.26,3056.8 3211.25,3056.8 3216.56,3062.11 3489.33,3062.11 3500.03,3051.42 3600.84,3051.42 3655.04,2997.22 4348.06,2997.22 4471.66,3120.82 4471.66,3169.71 4472.36,3170.42 4472.36,3186.89 4472.8,3187.32 4472.8,3200.26 4472.36,3200.7 4472.36,3210.8 ; v2(4457.68,3227.42) 4471.33,3213.77 4490.19,3213.77 4539.12,3213.77 4539.12,3238.41 4575.37,3238.41 4575.37,3113.77 4611.61,3113.77 4611.61,3206.12 4614.73,3209.24 4653.93,3209.24 v1(4721.98,3277.29)
DDR3_A5: R6.1 U1.R2 U2.P2 | length 2318.4
  Top w8.64: U1.R2@3439.7,3185.15 3439.7,3185.88 3455.69,3201.86 3459.69,3201.86 v2(3460.52,3202.7) ; v2(4272.22,3223.43) 4272.22,3223.02 4283.7,3211.54 U2.P2@4283.7,3211.13 ; v1(4634.98,3252.29) R6.1@4687.48,3252.29
  Signal Layer 3 w6.24: v2(3460.52,3202.7) 3498.41,3202.7 3498.71,3202.4 3513.87,3202.4 3536.38,3224.91 3584.94,3224.91 3607.49,3224.91 3607.49,3251.63 3643.74,3251.63 3643.74,3224.91 3679.98,3224.91 3679.98,3226.61 3716.22,3226.61 3716.22,3224.91 3752.46,3224.91 3752.46,3278.06 3788.7,3278.06 3788.7,3224.91 3824.95,3224.91 3824.95,3278.06 3861.19,3278.06 3861.19,3205.99 3897.43,3205.99 3897.43,3278.06 3933.67,3278.06 3933.67,3205.99 3969.91,3205.99 3969.91,3278.06 4006.16,3278.06 4006.16,3205.99 4042.4,3205.99 4042.4,3278.06 4078.64,3278.06 4078.64,3205.99 4114.88,3205.99 4114.88,3278.06 4151.13,3278.06 4151.13,3205.99 4187.37,3205.99 4187.37,3224.91 4190.49,3224.91 4253.23,3224.91 4254.71,3223.43 v2(4272.22,3223.43) 4303.48,3223.43 4398.94,3318.88 4432.78,3318.88 4449.25,3335.36 4476.54,3335.36 4482.34,3341.16 4538.87,3341.16 4543.29,3341.16 4570.41,3368.27 4596.03,3342.65 4579.33,3325.95 4609.1,3296.19 4611.3,3293.98 4634.98,3270.31 v1(4634.98,3252.29)
DDR3_A6: R7.1 U1.R1 U2.R8 | length 2331.9
  Top w8.64: U1.R1@3478.35,3185.15 v2(3506.5,3185.15) ; v2(4457.18,3193.79) 4457.85,3193.79 4472,3179.64 U2.R8@4472.68,3179.64 ; v1(4634.98,3193.12) 4636.43,3193.12 4646,3202.7 R7.1@4687.48,3202.7
  Signal Layer 3 w6.24: v2(3506.5,3185.15) 3508.32,3185.15 3515.33,3192.16 3549.98,3192.16 3553.1,3192.16 3553.1,3214.67 3589.34,3214.67 3589.34,3116.46 3625.58,3116.46 3625.58,3214.67 3661.82,3214.67 3661.82,3116.46 3698.07,3116.46 3698.07,3214.67 3734.31,3214.67 3734.31,3116.46 3770.55,3116.46 3770.55,3214.67 3806.79,3214.67 3806.79,3149.6 3843.03,3149.6 3843.03,3192.16 4174.84,3192.16 4225.82,3192.16 4241.47,3207.81 4302.35,3207.81 4311.53,3216.99 4382.16,3216.99 4391.66,3226.49 4426.59,3226.49 4456.74,3196.34 v2@4456.74,3196.18 ; v2@4457.18,3195.62 v2(4457.18,3193.79) 4457.27,3193.79 4473.81,3210.33 4473.81,3235.86 4482.97,3245.01 4489.44,3245.01 4504.42,3245.01 4516.22,3256.81 4518.38,3256.81 4518.38,3178.13 4554.62,3178.13 4554.62,3299.94 4590.86,3299.94 4590.86,3225.84 4627.1,3225.84 4627.1,3227.42 4633.88,3220.65 4634.98,3219.55 v1(4634.98,3193.12)
DDR3_A7: R8.1 U1.P10 U2.R2 | length 2443.7
  Top w8.64: U1.P10@3124.74,3145.78 v2@3143.56,3164.6 ; v2(4269.49,3192.18) 4270.32,3192.18 4282.87,3179.64 U2.R2@4283.7,3179.64 ; v1(4634.98,3152.25) R8.1@4687.48,3152.25
  Signal Layer 1 w6.24: v2(3144.29,3164.6) 3162.65,3146.24 3162.65,3124.15 3178.81,3107.99 3183.62,3107.99 3199.93,3091.68 3199.93,3086.87 3216.56,3070.24 3465.72,3070.24 3478.15,3082.66 3529.19,3082.66 3617.63,2994.22 3625.79,2994.22 3683.12,2994.22 3683.12,3010.96 3719.36,3010.96 3719.36,2957.22 3755.6,2957.22 3755.6,3015.68 3791.84,3015.68 3791.84,2957.22 3828.09,2957.22 3828.09,3022.23 3864.33,3022.23 3864.33,2957.22 3900.57,2957.22 3900.57,3022.23 3936.81,3022.23 3936.81,2957.22 3973.05,2957.22 3973.05,2994.22 3976.18,2994.22 4002.11,2994.22 4200.08,3192.18 v2(4269.49,3192.18) 4301.96,3192.18 4308.4,3185.75 4344.8,3185.75 4382.79,3223.74 4425.45,3223.74 4437.8,3211.38 4507.1,3211.38 4509.98,3208.5 4537.1,3208.5 4588.93,3260.34 4614.56,3234.71 4569.94,3190.09 4595.57,3164.47 4609.17,3178.06 4611.37,3175.85 v1(4634.98,3152.25)
DDR3_A8: R9.1 U1.N4 U2.T8 | length 2335.2
  Top w8.64: U1.N4@3360.96,3106.41 v2@3379.78,3125.23 ; v2(4456.04,3127.29) 4456.87,3128.12 4456.87,3132.34 U2.T8@4472.68,3148.14 ; v1(4721.98,3075.7) R9.1@4757.48,3075.7
  Signal Layer 3 w6.24: v2(3380.51,3125.23) 3398.45,3107.29 3471.75,3107.29 3493.18,3085.86 3530.3,3085.86 3584.94,3031.22 3596.79,3031.22 3636.02,3031.22 3636.02,3020.91 3672.26,3020.91 3672.26,3043.91 3708.5,3043.91 3708.5,2995.82 3744.74,2995.82 3744.74,3031.22 3780.99,3031.22 3780.99,2995.82 3817.23,2995.82 3817.23,3043.91 3853.47,3043.91 3853.47,2995.82 3889.71,2995.82 3889.71,3043.91 3925.95,3043.91 3925.95,2995.82 3962.2,2995.82 3962.2,3043.91 3998.44,3043.91 3998.44,2995.82 4034.68,2995.82 4034.68,3043.91 4070.92,3043.91 4070.92,2995.82 4107.17,2995.82 4107.17,3043.91 4143.41,3043.91 4143.41,2995.82 4179.65,2995.82 4179.65,3031.22 4182.77,3031.22 4201.57,3031.22 4296.98,3126.63 4344.98,3126.63 4345.63,3127.29 v2(4456.04,3127.29) 4456.04,3126.71 4466.75,3116 4477.2,3105.55 4477.78,3105.55 4507.63,3075.7 4510.55,3075.7 4510.55,3062.81 4546.79,3062.81 4546.79,3105.55 4583.03,3105.55 4583.03,3059.39 4619.28,3059.39 4619.28,3075.7 4622.4,3075.7 4633.88,3075.7 4654.16,3095.98 4701.7,3095.98 v1(4721.98,3075.7)
DDR3_A9: R10.1 U1.N3 U2.R3 | length 2318.4
  Top w8.64: U1.N3@3400.33,3106.41 v2@3419.15,3125.23 ; v2(4299.07,3164.81) 4299.72,3164.81 4314.55,3179.64 U2.R3@4315.2,3179.64 ; v1(4634.98,3102.56) R10.1@4687.48,3102.56
  Signal Layer 3 w6.24: v2(3419.88,3125.23) 3419.88,3126.63 3439.03,3145.78 3476.74,3145.78 3499.7,3122.82 3538.58,3122.82 3569.18,3092.22 3605.08,3092.22 3610.62,3092.22 3610.62,3093.01 3646.86,3093.01 3646.86,3054.15 3683.1,3054.15 3683.1,3095.98 3719.34,3095.98 3719.34,3047.41 3755.58,3047.41 3755.58,3095.98 3791.83,3095.98 3791.83,3054.15 3828.07,3054.15 3828.07,3095.98 3864.31,3095.98 3864.31,3054.15 3900.55,3054.15 3900.55,3104.83 3936.79,3104.83 3936.79,3054.15 3973.04,3054.15 3973.04,3104.83 4009.28,3104.83 4009.28,3054.15 4045.52,3054.15 4045.52,3104.83 4081.76,3104.83 4081.76,3054.15 4118,3054.15 4118,3104.83 4154.25,3104.83 4154.25,3047.41 4190.49,3047.41 4190.49,3092.22 4193.61,3092.22 4226.48,3092.22 v2(4299.07,3164.81) 4311.59,3164.81 4327.79,3164.81 4327.79,3137.53 4364.03,3137.53 4364.03,3148.65 4400.27,3148.65 4400.27,3137.53 4436.51,3137.53 4436.51,3142.91 4439.63,3142.91 4462.51,3142.91 4471.98,3133.44 4471.98,3125.26 4481.44,3115.79 4495.09,3115.79 4499.46,3115.79 4499.46,3100.29 4535.7,3100.29 4535.7,3151.71 4571.94,3151.71 4571.94,3115.79 4611.3,3115.79 4621.74,3115.79 v1(4634.98,3102.56)
DDR3_A10: R11.1 U1.M10 U2.L7 | length 2283.5
  Top w8.64: U1.M10@3124.74,3067.04 v2@3143.56,3085.86 ; v2(4418.98,3303.26) 4420.16,3303.26 4422.52,3305.62 U2.L7@4441.18,3305.62 ; v1(4634.98,3452.29) R11.1@4687.48,3452.29
  Signal Layer 4 w6.24: v2(3144.29,3085.86) 3163.11,3067.04 3186.93,3067.04 3202.85,3082.95 3202.85,3087.76 3218.76,3103.68 3223.57,3103.68 3239.44,3119.54 3239.44,3164.59 3261.92,3187.08 3466.99,3187.08 3480.69,3200.77 3512,3200.77 3537.71,3226.49 3789.56,3226.49 3867.19,3304.12 3874.93,3304.12 3928.16,3304.12 3928.16,3289.28 3964.4,3289.28 3964.4,3304.12 4000.64,3304.12 4000.64,3280.53 4036.89,3280.53 4036.89,3322.66 4073.13,3322.66 4073.13,3280.53 4109.37,3280.53 4109.37,3319.96 4145.61,3319.96 4145.61,3280.53 4181.85,3280.53 4181.85,3304.12 4184.98,3304.12 4261.52,3304.12 4262.07,3304.67 4275.01,3304.67 4284.16,3295.52 4284.16,3284.62 4293.86,3274.92 4315.71,3274.92 4344.05,3303.26 v2(4418.98,3303.26) 4419.83,3304.11 4517.24,3304.11 4523.25,3298.11 4528.42,3298.11 4534.99,3304.67 4556.76,3326.44 4506.89,3376.3 4532.52,3401.93 4592.76,3341.69 4618.39,3367.32 4584.2,3401.51 4586.4,3403.72 v1(4634.98,3452.29)
DDR3_A11: R12.1 U1.L3 U2.R7 | length 2460
  Top w8.64: U1.L3@3400.33,3027.67 v2@3419.15,3046.49 ; v2(4418.98,3175.3) 4420.16,3175.3 4422.76,3177.9 4439.44,3177.9 U2.R7@4441.18,3179.64 ; v1(4721.98,3126.91) 4722.17,3127.1 4757.29,3127.1 R12.1@4757.48,3127.29
  Signal Layer 1 w6.24: v2(3419.88,3046.49) 3438.42,3027.95 3473.94,3027.95 3487.49,3041.5 3523.02,3041.5 3650.29,2914.22 3794.96,2914.22 3794.96,2924.49 3831.21,2924.49 3831.21,2864.29 3867.45,2864.29 3867.45,2945.66 3903.69,2945.66 3903.69,2864.29 3939.93,2864.29 3939.93,2945.66 3976.18,2945.66 3976.18,2864.29 4012.42,2864.29 4012.42,2945.66 4048.66,2945.66 4048.66,2864.29 4084.9,2864.29 4084.9,2914.22 4088.02,2914.22 4091.76,2914.22 4352.84,3175.3 v2(4418.98,3175.3) 4477.25,3175.3 4481.44,3179.5 4492.2,3179.5 4566.06,3179.5 4590.43,3155.12 4502.9,3067.59 4528.53,3041.97 4616.06,3129.5 4618.26,3127.29 4626.89,3135.91 4655.65,3135.91 4668.51,3148.78 4700.11,3148.78 v1(4721.98,3126.91)
DDR3_A12: R13.1 U1.M8 U2.N7 | length 2263.3
  Top w8.64: U1.M8@3203.48,3067.04 v2@3222.3,3085.86 ; v2(4418.98,3243.34) 4419.33,3242.98 4440.83,3242.98 U2.N7@4441.18,3242.63 ; v1(4720.26,3326.91) 4720.45,3327.1 4757.29,3327.1 R13.1@4757.48,3327.29
  Signal Layer 4 w6.24: v2(3223.03,3085.86) 3223.57,3085.86 3243.75,3106.04 3462.15,3106.04 3475.52,3119.4 3621.5,3119.4 3698.62,3042.28 3729.98,3042.28 3891.92,3042.28 3891.92,3043.32 3928.16,3043.32 3928.16,3009.04 3964.4,3009.04 3964.4,3048.53 4000.64,3048.53 4000.64,3009.04 4036.89,3009.04 4036.89,3048.53 4073.13,3048.53 4073.13,3009.04 4109.37,3009.04 4109.37,3048.53 4145.61,3048.53 4145.61,3009.04 4181.85,3009.04 4181.85,3042.28 4184.98,3042.28 4219.82,3042.28 4369.25,3191.71 4425.77,3191.71 4435.38,3201.32 4435.38,3226.93 v2(4418.98,3243.34)
  Bottom w8.63: v2(4418.98,3243.34) 4418.98,3244.52 4431.32,3256.87 4431.32,3265.58 4437.42,3271.68 4476.2,3271.68 4483.19,3278.67 4504.29,3278.67 4518.41,3278.67 4518.41,3310.32 4557.03,3310.32 4557.03,3246.33 4595.66,3246.33 4595.66,3327.29 4599.98,3327.29 4719.88,3327.29 v1(4720.26,3326.91)
DDR3_A13: R14.1 U1.M6 U2.T3 | length 2318.4
  Top w8.64: U1.M6@3282.22,3067.04 v2@3301.04,3085.86 ; v2(4308.03,3107.29) 4308.03,3108.47 4315.2,3115.63 U2.T3@4315.2,3148.14 ; v1(4634.98,3052.29) R14.1@4687.48,3052.29
  Signal Layer 3 w6.24: v2(3301.77,3085.86) 3318.18,3069.45 3471.75,3069.45 3492.98,3048.22 3531.51,3048.22 3606.51,2973.22 3624.98,2973.22 3703.69,2973.22 3703.69,2964.4 3739.94,2964.4 3739.94,2983.21 3776.18,2983.21 3776.18,2932.66 3812.42,2932.66 3812.42,2974.42 3848.66,2974.42 3848.66,2932.66 3884.9,2932.66 3884.9,2973.22 3921.15,2973.22 3921.15,2932.66 3957.39,2932.66 3957.39,2973.22 3993.63,2973.22 3993.63,2932.66 4029.87,2932.66 4029.87,2983.21 4066.11,2983.21 4066.11,2932.66 4102.36,2932.66 4102.36,2983.21 4138.6,2983.21 4138.6,2932.66 4174.84,2932.66 4174.84,2973.22 4177.96,2973.22 4182.77,2973.22 4307.37,3097.81 4307.37,3106.62 v2(4308.03,3107.29) 4363.57,3107.29 4439.63,3031.22 4568.82,3031.22 4568.82,2957.23 4605.06,2957.23 4605.06,3031.22 4608.18,3031.22 4613.91,3031.22 v1(4634.98,3052.29)
DDR3_BA0: R15.1 U1.P3 U2.M2 | length 2454.2
  Top w8.64: U1.P3@3400.33,3145.78 v2@3419.15,3164.6 ; v2(4268.54,3289.05) 4268.66,3289.05 4283.58,3274.13 U2.M2@4283.7,3274.13 ; v1(4722.48,3426.91) 4722.67,3427.1 4757.29,3427.1 R15.1@4757.48,3427.29
  Signal Layer 1 w6.24: v2(3419.88,3164.6) 3436.11,3148.37 3484.37,3148.37 3500.03,3164.03 3548.15,3164.03 3560.33,3164.03 3560.33,3132.33 3596.57,3132.33 3596.57,3182.34 3632.81,3182.34 3632.81,3114.94 3669.06,3114.94 3669.06,3182.34 3705.3,3182.34 3705.3,3114.94 3741.54,3114.94 3741.54,3182.34 3777.78,3182.34 3777.78,3114.94 3814.02,3114.94 3814.02,3182.34 3850.27,3182.34 3850.27,3114.94 3886.51,3114.94 3886.51,3182.34 3922.75,3182.34 3922.75,3114.94 3958.99,3114.94 3958.99,3182.34 3995.23,3182.34 3995.23,3114.94 4031.48,3114.94 4031.48,3164.03 4034.6,3164.03 4048.41,3164.03 4174.13,3289.75 4267.84,3289.75 v2(4268.54,3289.05) 4282.67,3274.92 4330.45,3274.92 4331.24,3274.13 4350.23,3274.13 4394.98,3318.88 4424.08,3318.88 4440.89,3335.69 4482,3335.69 4503.66,3357.34 4505.28,3357.34 4526.94,3378.99 4527.65,3378.99 4534.34,3378.99 4534.34,3371.44 4570.58,3371.44 4570.58,3391.51 4606.82,3391.51 4606.82,3368.41 4643.07,3368.41 4643.07,3378.99 4646.19,3378.99 4655.65,3378.99 4702.08,3425.43 4720.99,3425.43 v1(4722.48,3426.91)
DDR3_BA1: R16.1 U1.P1 U2.N8 | length 2283.5
  Top w8.64: U1.P1@3478.35,3145.78 3502.69,3145.78 3505.32,3148.41 v2(3506.5,3148.41) ; v2(4458.69,3254.86) 4459.57,3254.86 4471.8,3242.63 U2.N8@4472.68,3242.63 ; v1(4720.26,3376.91) 4720.45,3377.1 4757.29,3377.1 R16.1@4757.48,3377.29
  Signal Layer 4 w6.24: v2(3506.5,3148.41) 3584.98,3148.41 3636.92,3148.41 3636.92,3210.59 3673.16,3210.59 3673.16,3141.05 3709.4,3141.05 3709.4,3216.25 3745.64,3216.25 3745.64,3141.05 3781.89,3141.05 3781.89,3216.25 3818.13,3216.25 3818.13,3141.05 3854.37,3141.05 3854.37,3231.25 3890.61,3231.25 3890.61,3141.05 3926.85,3141.05 3926.85,3231.1 3929.98,3234.22 4260.92,3234.22 4265.75,3239.05 4285.6,3239.05 4296.56,3228.09 4316.41,3228.09 4325.56,3237.24 4325.56,3242.78 4341.74,3258.96 4425.45,3258.96 4428.34,3256.07 v2@4457.78,3256.07 ; v2(4458.69,3254.86) 4458.98,3254.57 4474.55,3254.57 4482.89,3246.23 4496.63,3246.23 4505.78,3255.38 4505.78,3259.76 4530.64,3284.62 4540.01,3284.62 4540.01,3259.97 4576.25,3259.97 4576.25,3331.45 4612.49,3331.45 4612.49,3268.41 4648.73,3268.41 4648.73,3293.25 4651.85,3296.37 4672.57,3317.09 4672.57,3344.89 4703.9,3376.21 4719.56,3376.21 v1(4720.26,3376.91)
DDR3_BA2: R17.1 U1.N5 U2.M3 | length 2408.9
  Top w8.64: U1.N5@3321.59,3106.41 v2@3340.41,3125.23 ; v2(4299.07,3259.3) 4299.72,3259.3 4314.55,3274.13 U2.M3@4315.2,3274.13 ; v1(4634.98,3402.29) R17.1@4687.48,3402.29
  Signal Layer 2 w6.24: v2(3341.14,3125.23) 3342.01,3125.23 3361.53,3105.7 3462.36,3105.7 3480.51,3087.55 3538.92,3087.55 3569.68,3087.55 3569.68,3078.41 3605.92,3078.41 3605.92,3128.82 3642.17,3128.82 3642.17,3070.55 3678.41,3070.55 3678.41,3128.82 3714.65,3128.82 3714.65,3070.55 3750.89,3070.55 3750.89,3128.82 3787.13,3128.82 3787.13,3070.55 3823.38,3070.55 3823.38,3128.82 3859.62,3128.82 3859.62,3070.55 3895.86,3070.55 3895.86,3128.82 3932.1,3128.82 3932.1,3070.55 3968.34,3070.55 3968.34,3128.82 4004.59,3128.82 4004.59,3070.55 4040.83,3070.55 4040.83,3087.55 4043.95,3087.55 4048.09,3087.55 4185.45,3224.91 4225.72,3224.91 4241.43,3240.62 4279.03,3240.62 4297.72,3259.3 v2(4299.07,3259.3) 4441.03,3259.3 4454.6,3272.87 4479.08,3272.87 4483.69,3277.47 4524.79,3277.47 4547.02,3299.7 4528.24,3318.49 4553.86,3344.11 4603.93,3294.04 4629.56,3319.67 4598.28,3350.96 4600.48,3353.16 4633.49,3386.17 4633.49,3400.8 v1(4634.98,3402.29)
DDR3_CAS: R22.1 U1.P8 U2.K3 | length 2409.9
  Top w8.64: U1.P8@3203.48,3145.78 v2@3222.3,3164.6 ; v2(4302.03,3322.62) 4302.03,3323.29 4315.2,3336.45 U2.K3@4315.2,3337.12 ; v1(4726.48,3526.09) 4727.07,3526.69 4756.88,3526.69 R22.1@4757.48,3527.29